# EAGLE board AND (EAGLE 7.4.0)
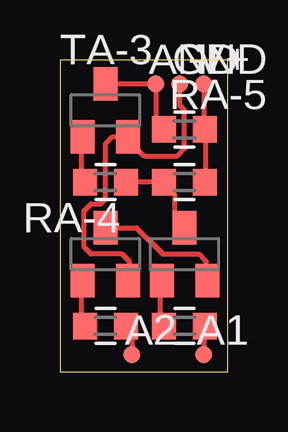
[diagram p0: board, top side]

Size 7 x 13 mm. Coordinates in mm from the lower left corner, seen from the top.
Outline: 0,0 7,0 7,13 0,13 0,0
Copper layers (1*16): Top 0.035mm / dielectric 1.5mm / Bottom 0.035mm
Design rules "Fusion_eagle_rule_v1.1 *": minimum track width 6mil, minimum drill 12mil, track to track 6mil, track to pad 6mil, pad to pad 6mil, via to via 6mil, smd to smd 0mil, copper to edge 10mil, drill to drill 10mil, minimum pad ring 15mil, minimum via ring 6mil, stop-mask expansion 2mil, vias tented up to drill 100mil, thermal gap 10mil

## Footprints (pad centres in the part's own frame; a part is rotated, then mirrored left to right if it is on the bottom)
TP07R = smd 0.7 x 0.7: TP 0,0
R0603 = smd 1 x 1.1: 1 -0.85,0; 2 0.85,0
SOT23-BEC = smd 1 x 1.4: B -0.95,-1.1; C 0,1.1; E 0.95,-1.1

## Placement (x,y rotation side)
A1  TPTP07R  [TP07R]  6,0.7 0 top
A2  TPTP07R  [TP07R]  3,0.7 0 top
AND  TPTP07R  [TP07R]  4,12 0 top
GND  TPTP07R  [TP07R]  5,12 0 top
RA-1  10k  [R0603]  5.2,1.9 180 top
RA-2  10k  [R0603]  1.9,1.9 180 top
RA-3  10k  [R0603]  5.2,7.9 0 top
RA-4  10k  [R0603]  1.9,7.9 180 top
RA-5  1k  [R0603]  5.2,10.1 0 top
TA-1  BC817  [SOT23-BEC]  5.2,4.9 0 top
TA-2  BC817  [SOT23-BEC]  1.9,4.9 0 top
TA-3  BC817  [SOT23-BEC]  1.9,10.9 0 top
V+  TPTP07R  [TP07R]  6,12 0 top

## Library data of the parts
A1 A2 AND GND V+ = testpad
RA-1-RA-5 = p.peter-rcl
TA-1-TA-3 = transistor

## Nets
+5V: RA-3.2 RA-5.2 V+.TP
A1: A1.TP RA-1.1
A2: A2.TP RA-2.1
AND: AND.TP RA-5.1 TA-3.C
GND: GND.TP TA-2.E TA-3.E
N$1: RA-1.2 TA-1.B
N$2: RA-3.1 RA-4.1 TA-1.C
N$3: RA-2.2 TA-2.B
N$4: TA-1.E TA-2.C
N$15: RA-4.2 TA-3.B

## Tracks (layer width: path | path; a pad name or v marks a point on that pad's centre or on a via)
+5V
  Top 0.2: RA-3.2 6.1,7.9 6.1,10.05 RA-5.2 6,10.15 V+.TP
A1
  Top 0.2: RA-1.1 6.1,1.9 6,1.8 A1.TP
A2
  Top 0.2: RA-2.1 2.8,1.9 3,1.8 A2.TP
AND
  Top 0.2: TA-3.C AND.TP 4,10.45 RA-5.1
GND
  Top 0.2: TA-2.E 2.9,3.8 2.9,4.6 2.6,4.9 1.3,4.9 1,5.2 1,6.7 1.3,7 1.7,7 1.9,7.2 1.9,9.5 2.2,9.8 TA-3.E 2.85,9.65 3.5,9 4.9,9 5.2,9.3 5.2,10.9 5,11.1 GND.TP
N$1
  Top 0.2: RA-1.2 4.3,1.9 4.2,2 4.2,3.75 TA-1.B
N$2
  Top 0.2: 2.8,7.85 RA-4.1 RA-3.1 | RA-3.1 4.4,7.9 RA-3.1 | TA-1.C 5.2,6.2 4.9,6.5 4.8,6.6 4.8,7.4 4.7,7.5 4.7,7.55 RA-3.1
N$3
  Top 0.2: RA-2.2 0.9,1.9 0.9,3.75 TA-2.B
N$4
  Top 0.2: TA-2.C 3.2,6 4.3,4.9 5.8,4.9 6.1,4.6 6.1,3.85 TA-1.E
N$15
  Top 0.2: RA-4.2 0.9,7.9 0.9,9.75 TA-3.B

## Text on the board
Document: AND